# EAGLE board WifeOLED (EAGLE 6.5.0)
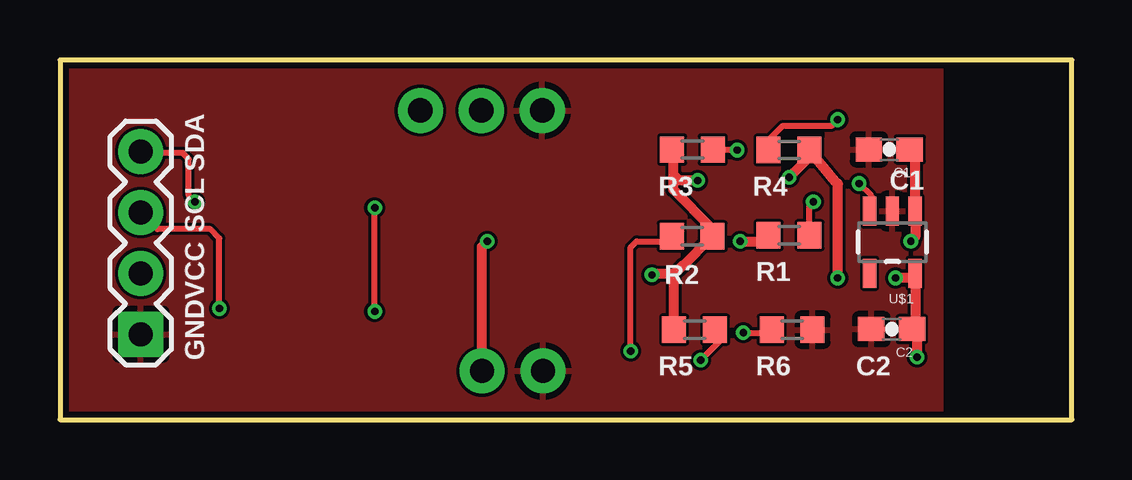
[diagram p0: board, top side]
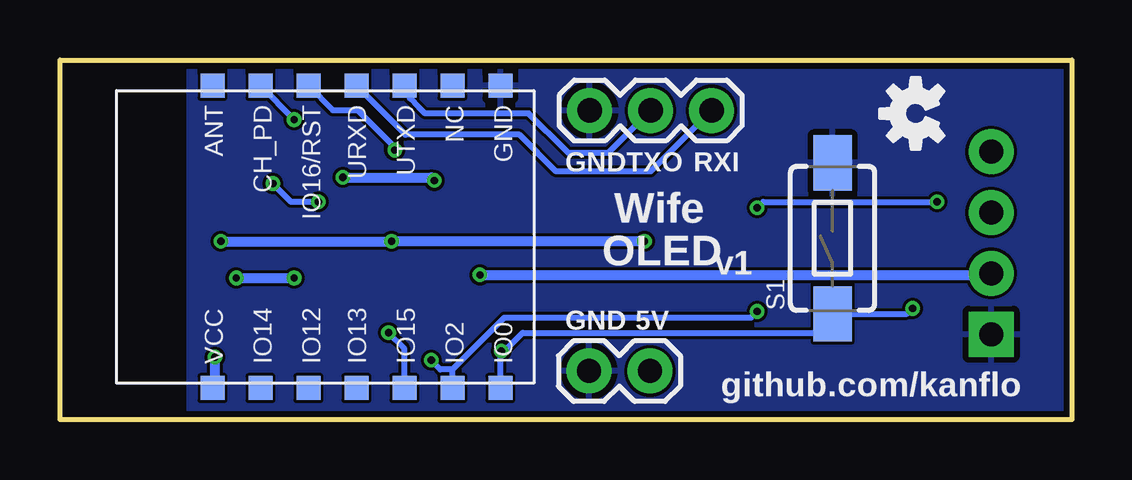
[diagram p1: board, bottom side, seen from below]

Size 42.18 x 15 mm. Coordinates in mm from the lower left corner, seen from the top.
Outline: 0,0 42.18,0 42.18,15 0,15 0,0
Copper layers (1*16): Top 0.035mm / dielectric 1.5mm / Bottom 0.035mm
Design rules "dirt_cheap_dirty_boards.v1": minimum track width 5mil, minimum drill 12mil, track to track 5mil, track to pad 5mil, pad to pad 5mil, via to via 5mil, smd to smd 0mil, copper to edge 10mil, drill to drill 10mil, minimum pad ring 10mil, minimum via ring 6mil, stop-mask expansion 2mil, vias tented up to drill 25mil, thermal gap 10mil

## Footprints (pad centres in the part's own frame; a part is rotated, then mirrored left to right if it is on the bottom)
0603-CAP = smd 1.1 x 1: 1 -0.85,0; 2 0.85,0
ESP-03 = smd 1 x 1: ANT -4.89,6.05; CH_PD -2.89,6.05; GND 7.11,6.05; GPIO0 7.11,-6.55; GPIO2 5.11,-6.55; GPIO12 -0.89,-6.55; GPIO13 1.11,-6.55; GPIO14 -2.89,-6.55; GPIO15 3.11,-6.55; GPIO16/RST -0.89,6.05; NC 5.11,6.05; URXD 1.11,6.05; UTXD 3.11,6.05; VCC -4.89,-6.55
1X03 = drill 1.016 pad 1.88: 1 0,0; 2 2.54,0; 3 5.08,0
1X02 = drill 1 pad 1.88: 1 0,0; 2 2.54,0
R0603 = smd 1 x 1.1: 1 -0.85,0; 2 0.85,0
TACTILE-SWITCH-1101NE = smd 2.3 x 1.6: 1 -3.15,0; 2 3.15,0
1X04 = drill 1 pad 1.88 square: 1 0,0 | drill 1 pad 1.88: 2 2.54,0; 3 5.08,0; 4 7.62,0
SOT23-5 = smd 0.55 x 1.2: 1 -0.95,-1.3; 2 0,-1.3; 3 0.95,-1.3; 4 0.95,1.3; 5 -0.95,1.3

## Placement (x,y rotation side)
C1  10uF  [0603-CAP]  34.57,11.26 180 top
C2  10uF  [0603-CAP]  34.67,3.77 180 top
ESP-1  ESP-03  [ESP-03]  30.94,7.87 0 bottom
JP1  [1X03]  20.1,12.89 0 bottom
PWR  M02PTH  [1X02]  20.13,2.02 0 bottom
R1  10k  [R0603]  30.39,7.69 0 top
R2  4k7  [R0603]  26.35,7.65 0 top
R3  4k7  [R0603]  26.37,11.26 180 top
R4  4k7  [R0603]  30.39,11.24 0 top
R5  4k7  [R0603]  26.45,3.75 180 top
R6  4k7  [R0603]  30.52,3.75 0 top
S1  SWITCH-MOMENTARY-2SMD-1101NE  [TACTILE-SWITCH-1101NE]  9.98,7.56 90 bottom
SCRN  [1X04]  3.37,3.56 90 top
U$1  SPX3819  [SOT23-5]  34.7,7.4 180 top
U$2  [OSHW-LOGO-S]  6.52,12.77 90 bottom

## Library data of the parts
C1 C2 = SparkFun-Capacitors; PROD_ID: CAP-11015
ESP-1 = ESP8266_ESP-03
JP1 PWR SCRN = SparkFun-Connectors
R1-R6 = resistor
S1 = SparkFun-Electromechanical; PROD_ID: SWCH-00815
U$1 = kanflo
U$2 = SparkFun-Aesthetics

## Nets
CH_PD: ESP-1.CH_PD R4.1
GND: C1.2 C2.2 ESP-1.GND JP1.1 PWR.1 R6.2 S1.2 SCRN.1 U$1.2
GPIO0/SCL: ESP-1.GPIO0 R2.1 S1.1 SCRN.3
GPIO2/SDA: ESP-1.GPIO2 R5.1 SCRN.4
GPIO15: ESP-1.GPIO15 R6.1
N$1: R1.2 U$1.3
RAW: C1.1 PWR.2 R1.1 U$1.1
RST: ESP-1.GPIO16/RST R3.1
RXI: ESP-1.URXD JP1.3
TXO: ESP-1.UTXD JP1.2
VCC: C2.1 ESP-1.VCC R2.2 R3.2 R4.2 R5.2 SCRN.2 U$1.5

## Tracks (layer width: path | path; a pad name or v marks a point on that pad's centre or on a via)
CH_PD  (via drill 0.3 pad 0.25)
  Top 0.254: R4.1 29.54,11.66 30.14,12.26 32.17,12.26 v32.42,12.51
  Bottom 0.254: v32.42,12.51 v32.42,12.52 ESP-1.CH_PD
GND
  pour Bottom (isolate 0.012): 0,15 36.8,15 36.8,0 0,0
  pour Top (isolate 0.012): 0,15 36.7,15 36.7,0 0,0
GPIO0/SCL  (via drill 0.3 pad 0.25)
  Top 0.254: v23.79,2.86 23.79,7.18 24.04,7.43 25.29,7.43 R2.1 | 3.43,8.57 SCRN.3 4.07,7.94 6.26,7.94 6.64,7.56 v6.64,4.64
  Bottom 0.254: ESP-1.GPIO0 23.83,2.82 v23.79,2.86 23.66,2.86 22.9,3.62 10.76,3.62 S1.1 6.87,4.41 v6.64,4.64
GPIO2/SDA  (via drill 0.3 pad 0.25)
  Top 0.254: v13.12,4.51 v13.12,8.83 | v5.63,9.08 5.37,9.34 5.37,10.86 5.12,11.11 3.43,11.11 SCRN.4 | v26.71,2.48 27.47,3.24 27.47,3.58 R5.1
  Bottom 0.254: ESP-1.GPIO2 25.83,2.09 | 25.83,2.09 23.66,4.26 13.37,4.26 v13.12,4.51 | v13.12,8.83 12.87,9.08 v5.63,9.08 | 25.83,2.09 26.32,2.09 v26.71,2.48
GPIO15  (via drill 0.3 pad 0.25)
  Top 0.254: v28.49,3.62 29.54,3.62 R6.1
  Bottom 0.254: ESP-1.GPIO15 27.83,2.96 v28.49,3.62
N$1  (via drill 0.3 pad 0.25)
  Top 0.254: R1.2 31.24,8.92 v31.41,9.08 | v33.31,9.84 33.82,9.34 33.82,8.77 U$1.3
  Bottom 0.254: v31.41,9.08 32.55,9.08 v33.31,9.84
RAW  (via drill 0.3 pad 0.25)
  Top 0.406: PWR.2 17.59,7.21 v17.82,7.43 | v28.36,7.43 29.29,7.43 R1.1 | v35.47,7.43 35.65,7.61 U$1.1 35.65,11.04 C1.1
  Bottom 0.406: v17.82,7.43 v28.36,7.43 v35.47,7.43
RST  (via drill 0.3 pad 0.25)
  Top 0.254: R3.1 28.21,11.26 v28.23,11.24
  Bottom 0.254: v28.23,11.24 28.23,11.37 29.76,12.89 30.8,12.89 ESP-1.GPIO16/RST
RXI
  Bottom 0.254: JP1.3 17.56,10.35 21.5,10.35 23.02,11.88 27.78,11.88 ESP-1.URXD
TXO
  Bottom 0.254: JP1.2 19.34,11.11 20.99,11.11 21.12,11.24 22.64,12.77 26.96,12.77 27.22,13.02 27.6,13.4 27.6,13.69 ESP-1.UTXD
VCC  (via drill 0.3 pad 0.25)
  Top 0.406: v35.73,2.61 35.73,3.37 35.52,3.57 C2.1 35.65,3.9 U$1.5 35.65,6.08 35.47,5.91 v34.84,5.91 | v32.42,5.91 32.42,9.81 | 32.42,9.81 32.42,9.84 32.42,9.81 | 31.49,10.99 R4.2 | 25.57,10.23 25.57,9.59 27.21,7.95 R2.2 25.98,6.42 25.95,6.42 25.6,6.07 | 25.57,10.23 25.57,11.21 R3.2 | R5.2 25.6,6.07 | 25.6,6.07 24.71,6.07 v24.68,6.04 | 32.42,9.81 R4.2 | R4.2 31.24,10.95 v30.39,10.1 | v26.58,9.97 25.82,9.97 25.57,10.23
  Bottom 0.406: v35.73,2.61 35.73,1.42 ESP-1.VCC | v34.84,5.91 v32.42,5.91 | v24.68,6.04 3.43,6.04 SCRN.2 | v30.39,10.1 26.71,10.1 v26.58,9.97

## Text on the board
tPlace: SDA | C1 | R3 | R4 | SCL | R2 | R1 | VCC | GND | R5 | R6 | C2
bPlace: RXI | TXO | GND | Wife | v1 | OLED | 5V | GND | github.com/kanflo